# Altium PCB Pulser.PcbDoc
Units mm, origin at the board's own origin, x right, y up, seen from the top; angles counter-clockwise.
Board outline 46.4 x 20.7 mm, 4 copper layers (Top Layer, Int1 (GND), Int2 (PWR), Bottom Layer), stack 1.56 mm thick; 35 components, 29 nets, 127 pads, 60 vias.
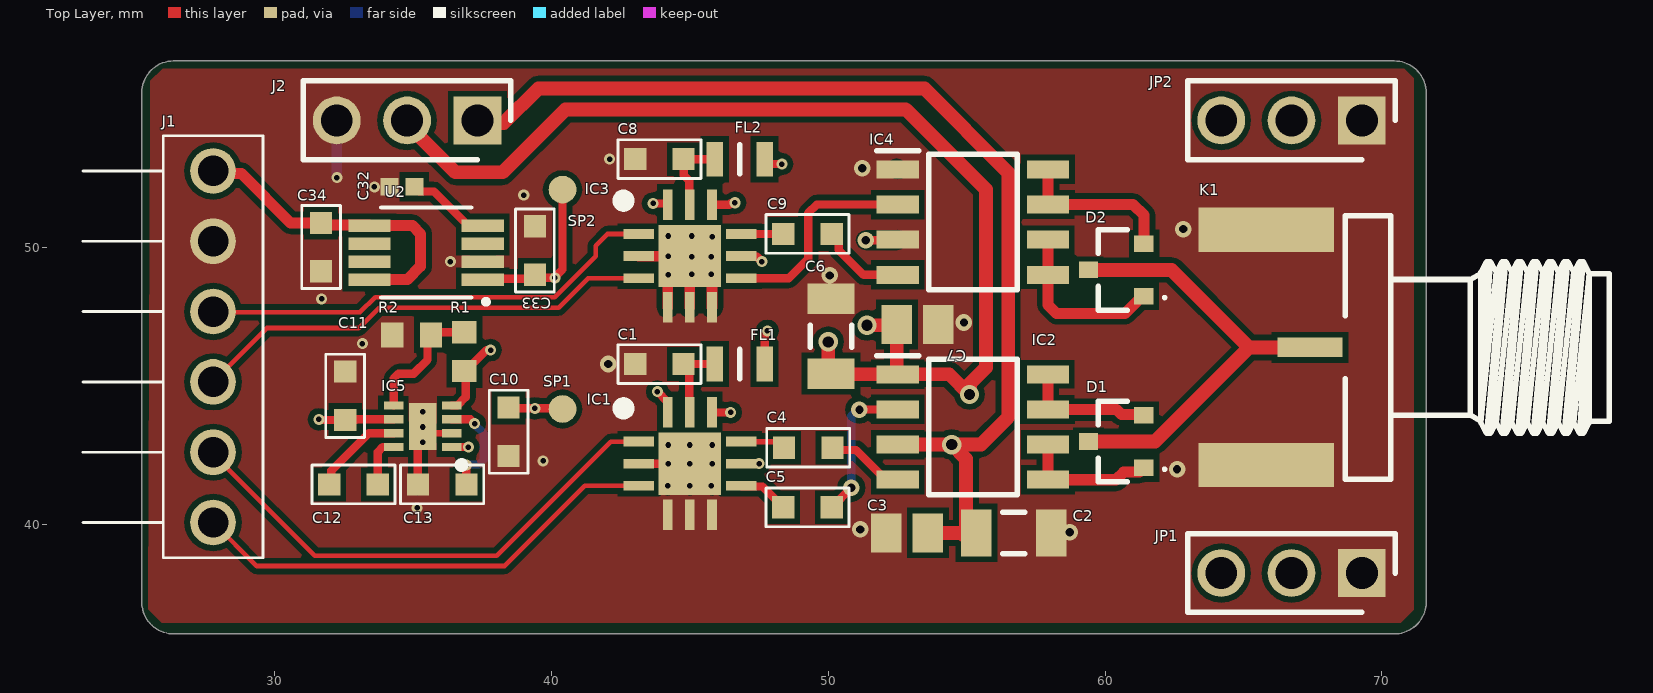
[diagram p0: Top Layer view]
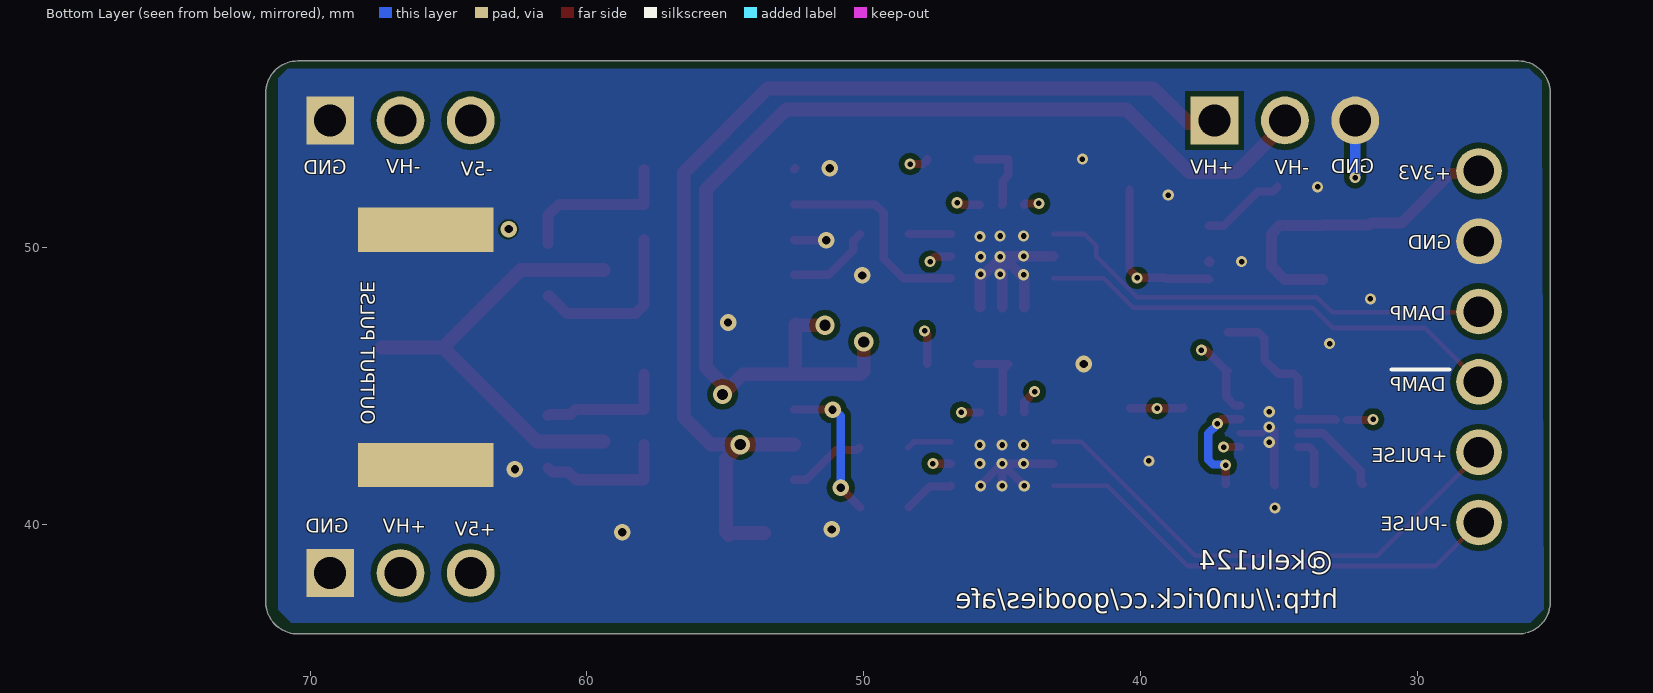
[diagram p1: Bottom Layer view, seen from below]
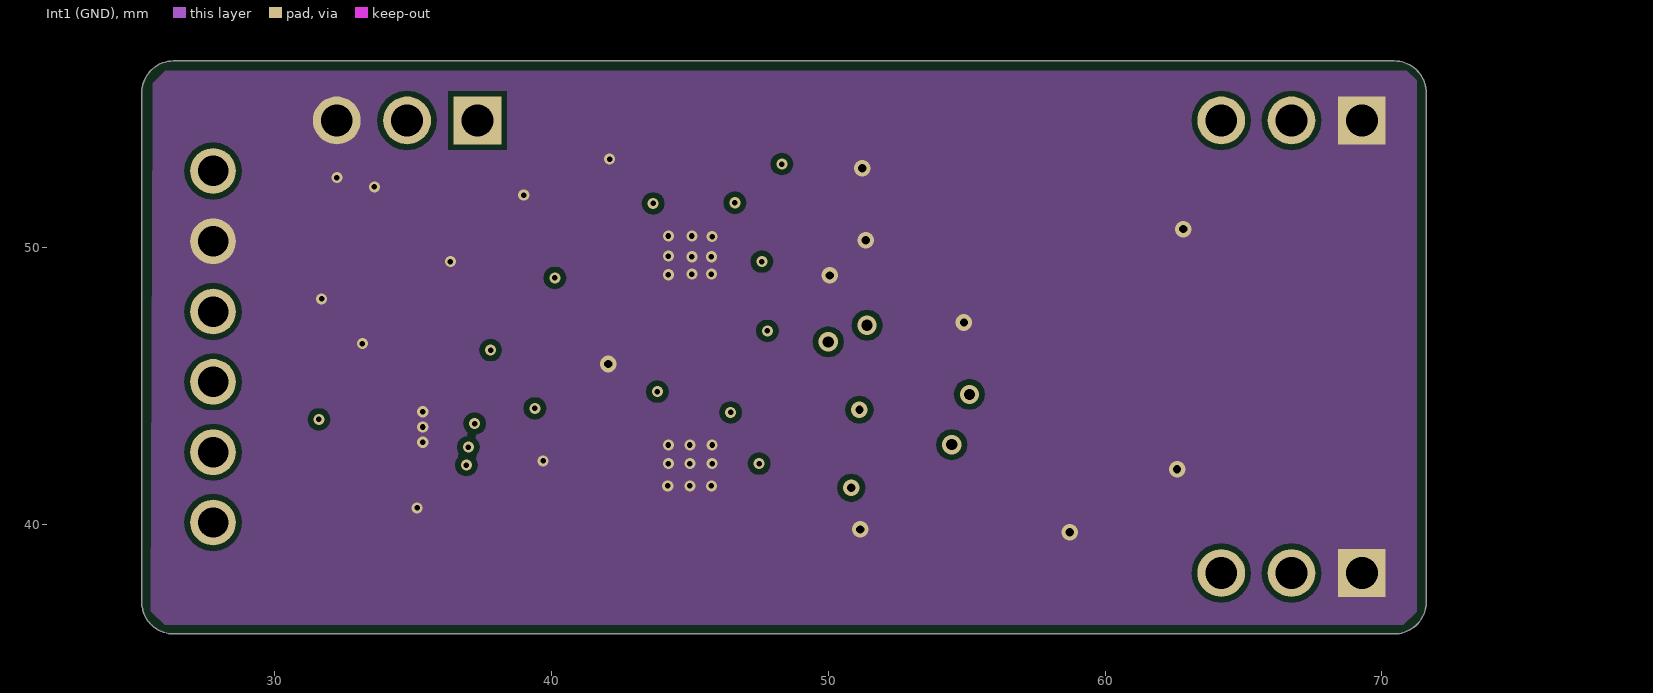
[diagram p2: Int1 (GND)]
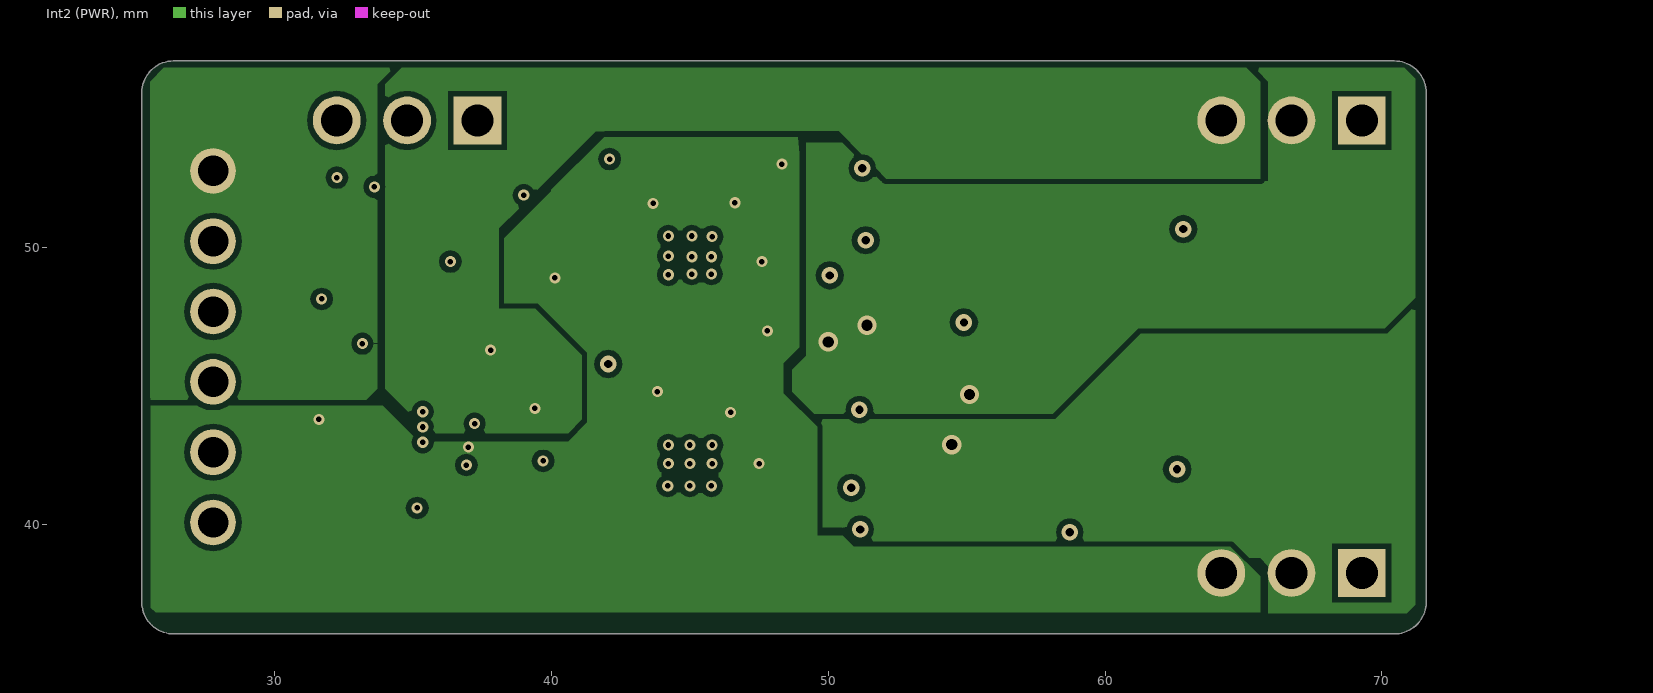
[diagram p3: Int2 (PWR)]
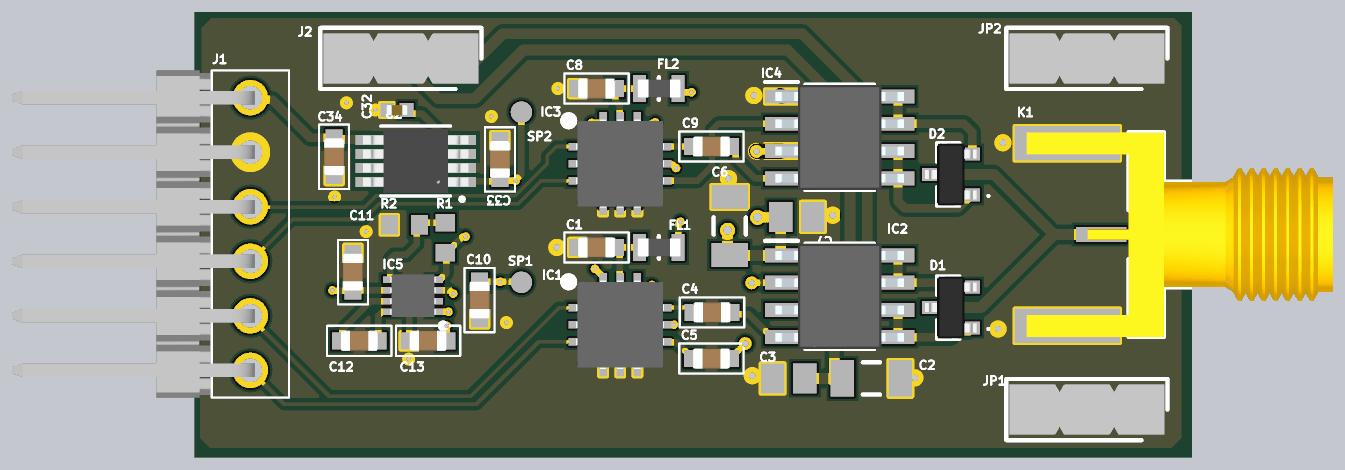
[diagram p4: 3D render of the assembled board from above, using the file's embedded part models]

## Layer stack, top to bottom
Top Solder: solder mask 0.0254, SM-001, Dk 4
Top Layer: signal copper 0.035
Dielectric 1: prepreg 0.11, PP-017, Dk 4.3
Int1 (GND): signal copper 0.035
Dielectric 3: core 1.2, Core-039, Dk 4.8
Int2 (PWR): signal copper 0.035
Dielectric 5: prepreg 0.11, PP-017, Dk 4.3
Bottom Layer: signal copper 0.035
Bottom Solder: solder mask 0.0254, SM-001, Dk 4

## Board outline
26.177,36.065 cw(c26.348,37.2) 25.212,37.03 cw(c25.4,37.1) 25.2,37.1 25.2,55.6 cw(c26.348,55.6) 26.347,56.748 cw(c26.348,56.548) 26.348,56.748 70.452,56.748 cw(c70.452,55.6) 71.6,55.6 71.6,37.1 cw(c71.4,37.1) 71.585,37.022 cw(c70.45,37.198) 70.614,36.061 cw(c70.552,36.252) 70.552,36.051 70.514,36.051 cw(c70.45,37.198) 70.45,36.05 cw(c70.45,36.25) 70.423,36.051 26.248,36.051 cw(c26.248,36.252)

## Design rules (kind name [scope] priority, off if disabled: settings)
Clearance [All] p1: gap=0.2 ignorepadtopadclearanceinfootprint=TRUE
ComponentClearance [All] p1: gap=0 collisioncheckmode=3 verticalgap=0 showdistances=FALSE
MinimumSolderMaskSliver [All] p1: minsoldermaskwidth=0
PolygonConnect [All] p1: connectstyle=Direct reliefconductorwidth=0.254 reliefentries=4 polygonreliefangle="90 Angle" airgapwidth=0.254
RoutingVias [All] p1: holewidth=0.2 width=0.4 viastyle="Through Hole" minholewidth=0.15 minwidth=0.3 maxholewidth=0.5 maxwidth=0.8
SilkToSilkClearance [All] p1: silktosilkclearance=0
SilkToSolderMaskClearance [IsPad] p1: minsilkscreentomaskgap=0 clearancetoexposedcopper=TRUE
SolderMaskExpansion [All] p1: expansion=0.102
UnRoutedNet [All] p1: checkbadconnections=TRUE
Width [All] p1: maxlimit=0.6 minlimit=0.15 preferedwidth=0.2
25 further rules are at their usual default settings.

## Components (designator, comment, footprint, x,y, rotation, side; value= is the part's Value field where it differs from the comment)
C1 "cap0603" "SM0603 _3D_cap" 43.9,45.8 r180 top value=100nF
C2 "cap0603" C1206 56.7,39.7 r0 top value="1uF 150V"
C3 "cap0603" C0805 52.85,39.7 r180 top value="100nF 150V"
C4 "cap0603" "SM0603 _3D_cap" 49.275,42.775 r0 top value=10nF
C5 "cap0603" "SM0603 _3D_cap" 49.25,40.625 r0 top value=10nF
C6 "cap0603" C1206 50.1,46.8 r90 top value="1uF 150V"
C7 "cap0603" C0805 53.225,47.225 r0 top value="100nF 150V"
C8 "cap0603" "SM0603 _3D_cap" 43.9,53.2 r180 top value=100nF
C9 "cap0603" "SM0603 _3D_cap" 49.25,50.5 r0 top value=10nF
C10 "cap0603" "SM0603 _3D_cap" 38.45,43.35 r270 top value="4.7u 16V"
C11 "cap0603" "SM0603 _3D_cap" 32.55,44.65 r90 top value="4.7u 16V"
C12 "cap0603" "SM0603 _3D_cap" 32.85,41.45 r180 top value=1u
C13 "cap0603" "SM0603 _3D_cap" 36.05,41.45 r180 top value="4.7u 16V"
C32 "cap0402" 0402_C 34.6,52.2 r0 top value=470p
C33 "cap0603" "SM0603 _3D_cap" 39.4,49.9 r90 top value=1u
C34 "cap0603" "SM0603 _3D_cap" 31.675,50.025 r270 top value="1u 16V"
D1 "BAV99" BAV99215 60.4,43 r90 top
D2 "BAV99" BAV99215 60.4,49.2 r90 top
FL1 "BLM21PG121SN1D" BLM21AG102BH1J 46.8,45.8 r0 top
FL2 "BLM21PG121SN1D" BLM21AG102BH1J 46.8,53.2 r0 top
IC1 "MD1213K6-G" QFN80P400X400X100-13N-D 45,42.2 r0 top
IC2 "TC6320TG-G" SOIC127P600X175-8N 55.225,43.525 r0 top
IC3 "MD1213K6-G" QFN80P400X400X100-13N-D 45,49.7 r0 top
IC4 "TC6320TG-G" SOIC127P600X175-8N 55.225,50.925 r0 top
IC5 "LM27761DSGR" SON50P200X200X80-9N 35.35,43.55 r180 top
J1 "90121-0766" 901210766 26.325,46.425 r90 top
J2 "5-146281-3" HDRV3W96P0X254_1X3_721X234X869P 37.325,54.6 r180 top
JP1 "5-146281-3" HDRV3W96P0X254_1X3_721X234X869P 69.275,38.25 r180 top
JP2 "5-146281-3" HDRV3W96P0X254_1X3_721X234X869P 69.275,54.6 r180 top
K1 "SMA_Edge" AMPHENOL_132357-11 67.4,46.4 r180 top
R1 "155K" 1608[0603] 36.85,46.25 r270 top value=1K
R2 "50K" 1608[0603] 34.95,46.85 r0 top value=1K
SP1 "SolderPad D1mm_round" "SolderPad_D1mm _round"#1 40.4,44.175 r90 top value="\"-5V\""
SP2 "SolderPad D1mm_round" "SolderPad_D1mm _round"#2 40.4,50.1 r90 top value="\"+5V\""
U2 "TC1107-5.0VUA" MSOP8_MC_MCH_ 35.475,49.825 r180 top

## Footprints (in the part's own frame and the unit in brackets; to place one, negate y for a bottom-side part, rotate by r counter-clockwise, add the part's x,y. Pads: shape width x height; smd on the part's side, far side on the other; paste and mask are expansions set on the pad)
0402_C [mm]
  rect 0.65x0.64 smd: 1(-0.45,0) 2(0.45,0)
  body extent -0.5,-0.25 0.5,0.25, height 0.56
1608[0603] [mm] "Chip Capacitor, Body 1.6x0.8mm, IPC High Density"
  rect 0.8x0.9 smd: 1(-0.7,0) 2(0.7,0)
  body extent -0.87,-0.48 0.87,0.48, height 1.3
901210766 [mm]
  round 1.65 hole 1.1: 1(-6.35,-1.45) 2(-3.81,-1.45) 3(-1.27,-1.45) 4(1.27,-1.45) 5(3.81,-1.45) 6(6.35,-1.45)
  silkscreen extent -7.62,-3.25 7.62,3.25, body extent -7.62,-1.66 7.62,9.66, height 3.42
AMPHENOL_132357-11 [mm]
  rect 2.35x0.7 smd: 1(0,0)
  rect 4.9x1.6 smd: 2(1.575,4.25) 2(1.575,-4.25)
  rect 4.9x1.6 smd far side: 2(1.575,4.25) 2(1.575,-4.25)
  silkscreen extent -10.81,-4.76 -1.28,4.76, body extent -10.8,-4.76 3.48,4.76, height 4.08
BAV99215 [mm]
  rect 0.6x0.7 smd: 1(-0.95,-1) 2(0.95,-1) 3(0,1)
  silkscreen extent -1.45,-1.8 1.45,0.65, body extent -1.45,-1.2 1.45,1.2, height 0.95
BLM21AG102BH1J [mm]
  rect 0.6x1.25 smd: 1(-0.9,0) 2(0.9,0)
  silkscreen extent 0,-0.53 0,0.53, body extent -0.98,-0.43 1.02,0.43, height 0.63
C0805 [mm] "Chip Capacitor, Body 2.0x1.3mm, IPC High Density"
  rect 1.1x1.4 smd: 1(-0.75,0) 2(0.75,0)
  body extent -1.1,-0.72 1.1,0.72, height 1.4
C1206 [mm] "Chip Capacitor, Body 3.2x1.6mm, IPC High Density"
  rect 1.1x1.7 smd: 1(-1.35,0) 2(1.35,0)
  silkscreen extent -0.4,-0.75 0.4,0.75, body extent -1.7,-0.9 1.7,0.9, height 1.3
HDRV3W96P0X254_1X3_721X234X869P [mm]
  rect 1.725x1.725 hole 1.15: 1(0,0)
  round 1.725 hole 1.15: 2(2.54,0) 3(5.08,0)
  silkscreen extent -1.21,-1.43 6.29,1.43, body extent -1.07,-1.17 6.15,1.17, height 8.12
MSOP8_MC_MCH_ [mil]
  rect 60x18 smd paste+0 mask+0: 1(-80.5,38.39) 2(-80.5,12.8) 3(-80.5,-12.8) 4(-80.5,-38.39) 5(80.5,-38.39) 6(80.5,-12.8) 7(80.5,12.8) 8(80.5,38.39)
  silkscreen extent -87,-64 64,72, body extent -96,-59 96,59, height 43
QFN80P400X400X100-13N-D [mm]
  rect 1.1x0.35 smd: 1(-1.85,0.8) 2(-1.85,0) 3(-1.85,-0.8) 7(1.85,-0.8) 8(1.85,0) 9(1.85,0.8)
  rect 0.35x1.1 smd: 4(-0.8,-1.85) 5(0,-1.85) 6(0.8,-1.85) 10(0.8,1.85) 11(0,1.85) 12(-0.8,1.85)
  rect 2.25x2.25 smd: 13(0,0)
  silkscreen extent -2.6,1.8 -2.2,2.2, body extent -2.05,-2.05 2.05,2.05, height 1
"SM0603 _3D_cap" [mm]
  rect 0.8x0.8 smd: 1(-0.875,0) 2(0.875,0)
  silkscreen extent -1.5,-0.7 1.5,0.7, body extent -0.87,-0.47 0.88,0.48, height 0.87
SOIC127P600X175-8N [mm]
  rect 1.525x0.65 smd: 1(-2.712,1.905) 2(-2.712,0.635) 3(-2.712,-0.635) 4(-2.712,-1.905) 5(2.712,-1.905) 6(2.712,-0.635) 7(2.712,0.635) 8(2.712,1.905)
  silkscreen extent -3.47,-2.45 1.6,2.58, body extent -3,-2.45 3,2.45, height 1.75
"SolderPad_D1mm _round"#1 [mm]
  round 1 smd: 1(0,0)
"SolderPad_D1mm _round"#2 [mm]
  round 1 smd: 1(2,0)
SON50P200X200X80-9N [mm]
  rect 0.7x0.3 smd: 1(-1.05,0.75) 2(-1.05,0.25) 3(-1.05,-0.25) 4(-1.05,-0.75) 5(1.05,-0.75) 6(1.05,-0.25) 7(1.05,0.25) 8(1.05,0.75)
  rect 1x1.7 smd: 9(0,0)
  silkscreen extent -1.53,1.28 -1.28,1.52, body extent -1.05,-1 1.05,1, height 0.8

## Part data
C1 C2 C3 C4 C5 C6 C7 C8 C9 C10 C11 C12 C13 C33 C34: "Capacitor  0603 inch", LatestRevisionDate=17-Jul-2002, LatestRevisionNote="Re-released for DXP Platform.", PackageDescription="Radial Cap, Thru-Hole; 2 Leads; 0.3 in Pin Spacing", PackageReference=RAD-0.3, Published=8-Jun-2000, Publisher="Altium Limited"
C32: library part cap0603, "Capacitor  0402 inch", LatestRevisionDate=17-Jul-2002, LatestRevisionNote="Re-released for DXP Platform.", PackageDescription="Radial Cap, Thru-Hole; 2 Leads; 0.3 in Pin Spacing", PackageReference=RAD-0.3, Published=8-Jun-2000, Publisher="Altium Limited"
D1 D2: library part BAV99,215, "Diode", Manufacturer_Name=Nexperia, Mouser Part Number=771-BAV99-T/R, Arrow Part Number=BAV99,215, Arrow Price/Stock=https://www.arrow.com/en/products/bav99215/nexperia?region=nac, Datasheet Link=https://assets.nexperia.com/documents/data-sheet/BAV99_SER.pdf, Height=1.1mm, Manufacturer_Part_Number=BAV99,215, Mouser Price/Stock=https://www.mouser.co.uk/ProductDetail/Nexperia/BAV99215?qs=me8TqzrmIYWbN0bCKV3n5w%3D%3D
FL1 FL2: "Filter", Manufacturer_Name="Murata Electronics", Mouser Part Number=81-BLM21PG121SN1D, Arrow Part Number=BLM21PG121SN1D, Arrow Price/Stock=https://www.arrow.com/en/products/blm21pg121sn1d/murata-manufacturing?region=nac, Datasheet Link=https://www.murata.com/en-us/products/productdetail?partno=BLM21PG121SN1%23, Height=1.05mm, Manufacturer_Part_Number=BLM21PG121SN1D, Mouser Price/Stock=https://www.mouser.co.uk/ProductDetail/Murata-Electronics/BLM21PG121SN1D?qs=MY6wChARw2zaR3kESBLGTQ%3D%3D
IC1 IC3: "Integrated Circuit", Manufacturer_Name=Microchip, Mouser Part Number=689-MD1213K6-G, Arrow Part Number=MD1213K6-G, Arrow Price/Stock=https://www.arrow.com/en/products/md1213k6-g/microchip-technology, Datasheet Link=http://www.microchip.com/mymicrochip/filehandler.aspx?ddocname=en570148, Height=1mm, Manufacturer_Part_Number=MD1213K6-G, Mouser Price/Stock=https://www.mouser.co.uk/ProductDetail/Microchip-Technology/MD1213K6-G?qs=yzbL9BrvDmMQeiy2ctoE9A%3D%3D
IC2 IC4: "Integrated Circuit", Manufacturer_Name=Microchip, Mouser Part Number=689-TC6320TG-G, Arrow Part Number=TC6320TG-G, Arrow Price/Stock=https://www.arrow.com/en/products/tc6320tg-g/microchip-technology?region=nac, Datasheet Link=https://ww1.microchip.com/downloads/en/DeviceDoc/20005697A.pdf, Height=1.75mm, Manufacturer_Part_Number=TC6320TG-G, Mouser Price/Stock=https://www.mouser.co.uk/ProductDetail/Microchip-Technology/TC6320TG-G?qs=%252BgoAgGjL%252Bh4K5qliaxT5nQ%3D%3D
IC5: "Integrated Circuit", Manufacturer_Name="Texas Instruments", Mouser Part Number=595-LM27761DSGR, Arrow Part Number=LM27761DSGR, Arrow Price/Stock=https://www.arrow.com/en/products/lm27761dsgr/texas-instruments?region=nac, Datasheet Link=http://www.ti.com/lit/gpn/lm27761, Height=0.8mm, Manufacturer_Part_Number=LM27761DSGR, Mouser Price/Stock=https://www.mouser.co.uk/ProductDetail/Texas-Instruments/LM27761DSGR?qs=jK8VN%252BJp1h5rfPCO21nS4g%3D%3D
J1: "Connector", Manufacturer_Name=Molex, Mouser Part Number=538-90121-0766, Datasheet Link=http://www.molex.com/webdocs/datasheets/pdf/en-us/0901210766_PCB_HEADERS.pdf, Height=4mm, Manufacturer_Part_Number=90121-0766, Mouser Price/Stock=https://www.mouser.co.uk/ProductDetail/Molex/90121-0766?qs=PvP5v7EimslgD6hQyHQ2Ag%3D%3D
J2 JP1 JP2: "Connector", Manufacturer_Name="TE Connectivity", Mouser Part Number=571-5-146281-3, Arrow Part Number=5-146281-3, Arrow Price/Stock=https://www.arrow.com/en/products/5-146281-3/te-connectivity, Datasheet Link=http://www.te.com/commerce/DocumentDelivery/DDEController?Action=showdoc&DocId=Customer+Drawing%7F146281%7FG2%7Fpdf%7FEnglish%7FENG_CD_146281_G2.pdf%7F5-146281-3, Height=8.69mm, Manufacturer_Part_Number=5-146281-3, Mouser Price/Stock=https://www.mouser.co.uk/ProductDetail/TE-Connectivity/5-146281-3?qs=bwpFY26eRVc0RlLXOkMSNw%3D%3D
R1 R2: library part Res1, "Resistor", LatestRevisionDate=17-Jul-2002, LatestRevisionNote="Re-released for DXP Platform.", PackageDescription="Axial Device, Thru-Hole; 2 Leads; 0.3 in Pin Spacing", PackageReference=AXIAL-0.3, Published=8-Jun-2000, Publisher="Altium Limited"
SP1 SP2: "for finger touch"
U2: "No Description Available", Mfr_Name=Microchip, Copyright="Copyright (C) 2022 Ultra Librarian. All rights reserved.", Manufacturer_Part_Number=TC1107-5.0VUA, RefDes=RefDes, Type=DEV

## Via types
v1: diameter 0.4, hole 0.2, Top Layer to Bottom Layer, 45 vias
v2: diameter 0.6, hole 0.3, Top Layer to Bottom Layer, 11 vias
v3: diameter 0.7, hole 0.4, Top Layer to Bottom Layer, 4 vias

## Nets (pads, with @x,y where several pads share a name; then routed paths per layer and width w, separated by ;. In a path a pad name is that pad's centre, name@x,y a point inside that pad or via, vN(x,y) a via of type N, cw(c..) or ccw(c..) an arc to the next point about the centre after c; other vN are vias at no path point)
+3V3: C34.1 J1.6 U2.5 U2.8 | length 11.7
  Top Layer w0.4: J1.6 27.875,52.675 28.8,52.675 30.575,50.9 C34.1 31.746,50.829 33.402,50.829 U2.5 34.975,50.8 35.275,50.5 35.275,49.333 34.792,48.85 U2.8
+5V: C11.1 C33.1 FL1.2 FL2.2 IC1.8 IC1.10 IC1.12 IC3.8 IC3.10 IC3.12 IC5.1 IC5.6 JP1.3 SP2.1 U2.1 | length 15.3
  Top Layer w0.3: v1(31.6,43.8) 31.625,43.775 C11.1 ; C11.1@32.95,43.775 32.975,43.8 IC5.6 ; IC5.1 v1(37,42.8) ; U2.1 37.545,48.875 39.075,48.875 39.113,48.912 v1(40.125,48.912) 40.125,48.94 40.4,49.215 SP2.1 ; v1(43.675,51.6) 44.175,51.6 44.2,51.575 IC3.12 ; v1(43.825,44.8) 44.2,44.425 IC1.12 ; IC1.10 v1(46.475,44.05) ; IC3.10 46.425,51.55 46.481,51.606 46.606,51.606 v1(46.625,51.625) ; IC1.8 v1(47.5,42.2) ; IC3.8 46.875,49.675 47.425,49.675 v1(47.6,49.5) ; FL1.2 47.7,46.875 47.8,46.975 v1(47.8,47) ; FL2.2 47.7,53.175 47.85,53.025 v1(48.325,53.025)
+HV: C2.1 C3.1 IC2.3 J2.1 JP1.2 | length 39.1
  Top Layer w0.5: J2.1 37.425,54.5 38.275,54.5 39.525,55.75 53.475,55.75 56.5,52.725 56.5,43.875 55.515,42.89 v3(54.46,42.89) ; IC2.3 v3(54.46,42.89) ; C3.1 54.8,39.7 54.875,39.625 54.975,39.725 54.975,42.375 v3(54.46,42.89)
+PULSE: IC1.1 J1.2 | length 18.7
  Top Layer w0.17: J1.2 27.775,42.543 31.448,38.87 38.027,38.87 42.15,42.993 43.143,42.993 IC1.1
-5V: C10.1 IC5.4 JP2.3 R1.2 SP1.1 | length 4.8
  Top Layer w0.3: IC5.4 36.6,44.3 36.9,44.6 36.9,45.5 R1.2 36.9,45.55 37.65,46.3 v1(37.8,46.3) ; C10.1 38.475,44.2 v1(39.4,44.2) SP1.1@40.375,44.2
-HV: C6.1 C7.1 IC2.1 J2.2 JP2.2 | length 40.8
  Top Layer w0.5: J2.2@34.785,54.475 36.535,52.725 38.225,52.725 40.5,55 52.8,55 55.7,52.1 55.7,45.675 55.125,45.1 55.125,44.725 v3(55.1,44.7) 54.37,45.43 IC2.1 ; v3(50,46.6) 50,45.55 C6.1 50.12,45.43 IC2.1 ; v3(51.4,47.2) 52.45,47.2 C7.1 52.475,45.468 IC2.1
-PULSE: IC1.3 J1.1 | length 17.2
  Top Layer w0.17: J1.1 29.35,38.5 38.3,38.5 41.2,41.4 IC1.3
D\A\M\P\: IC3.3 J1.3 | length 16.9
  Top Layer w0.17: J1.3 29.72,47.1 33.039,47.1 33.774,47.835 40.257,47.835 41.322,48.9 IC3.3
DAMP: IC3.1 J1.4 | length 16.8
  Top Layer w0.17: J1.4 27.805,47.665 33.081,47.665 33.631,48.215 40.113,48.215 41.6,49.702 41.6,50.073 42.027,50.5 IC3.1
GND: C1.2 C2.2 C3.2 C6.2 C7.2 C8.2 C10.2 C11.2 C13.2 C32.1 C33.2 C34.2 IC1.2 IC1.4 IC1.5 IC1.6 IC1.13 IC3.2 IC3.4 IC3.5 IC3.6 IC3.13 IC4.1 IC4.3 IC5.2 IC5.9 J1.5 J2.3 JP1.1 JP2.1 K1.2 R2.1 U2.2 | length 19.5
  Top Layer w0.25: IC5.9@35.362,43.538 35.6,43.3 IC5.2
  Top Layer w0.3: C13.2@35.15,41.425 C13.2 35.175,43.375 IC5.9 ; IC1.2 v1(44.225,42.2) v1(45,42.2) ; v1(44.2,41.4) v1(45,42.2) ; v1(45,41.4) v1(45,42.2) ; IC1.13@45.8,41.4 v1(45,42.2) ; v2(51.35,50.275) 52.498,50.275 IC4.3 ; IC4.1@52.468,52.875 IC4.1
  Top Layer w0.381: IC3.2 v1(44.225,49.7) IC3.13 ; IC3.4 44.2,48.9 IC3.13 ; IC3.5 IC3.13 ; IC3.6 45.8,48.9 IC3.13
  Bottom Layer w0.3: v2(62.825,50.675) v2@62.85,50.65
  Bottom Layer w0.381: J2.3@32.245,54.475 32.245,52.54 v1(32.25,52.535)
  other v1: 35.15,40.6 45.775,41.4 45.8,42.2 39.7,42.3 44.225,42.875 45,42.875 45.8,42.875 35.35,42.975 35.35,43.525 35.35,44.075 33.168,46.538 31.7,48.15 44.225,49.025 45.075,49.05 45.775,49.05 36.35,49.5 45.075,49.675 45.775,49.675 45.8,50.4 44.225,50.425 45.075,50.425 39,51.9 33.6,52.2 42.1,53.2
  other v2: 58.725,39.725 51.15,39.825 62.6,42 42.05,45.8 54.9,47.3 50.05,49 51.225,52.875
NetC1_1: C1.1 FL1.1 IC1.11 | length 3
  Top Layer w0.3: IC1.11 44.975,44.075 44.975,45.6 C1.1 FL1.1
NetC4_1: C4.1 IC1.9 | length 1.6
  Top Layer w0.2: IC1.9 48.175,43 C4.1
NetC4_2: C4.2 IC2.4 | length 2.8
  Top Layer w0.3: C4.2 50.23,42.695 51,42.695 52.075,41.62 IC2.4
NetC5_1: C5.1 IC1.7 | length 1.8
  Top Layer w0.3: IC1.7 46.875,41.375 47.625,41.375 C5.1
NetC5_2: C5.2 IC2.2 | length 5.4
  Top Layer w0.3: C5.2 v2(50.825,41.325) ; v2(51.125,44.15) 51.135,44.16 IC2.2
  Bottom Layer w0.3: v2(50.825,41.325) 50.825,43.925 51.05,44.15 v2(51.125,44.15)
NetC8_1: C8.1 FL2.1 IC3.11 | length 2.9
  Top Layer w0.3: IC3.11 44.975,51.575 44.975,52.425 44.775,52.625 C8.1 FL2.1
NetC9_1: C9.1 IC3.9 | length 1.5
  Top Layer w0.3: IC3.9 C9.1
NetC9_2: C9.2 IC4.4 | length 3.2
  Top Layer w0.3: C9.2 50.375,50.25 50.375,49.925 51.28,49.02 IC4.4
NetC12_1: C12.1 IC5.8 | length 1.8
  Top Layer w0.3: C12.1 33.725,42.624 33.901,42.8 IC5.8
NetC12_2: C12.2 IC5.7 | length 3.3
  Top Layer w0.3: C12.2 32.05,41.525 32.05,41.95 33.4,43.3 IC5.7
NetC13_1: C13.1 IC5.3 | length 3.8
  Top Layer w0.3: IC5.3 37.075,43.8 v1(37.225,43.65) ; C13.1 v1(36.925,42.15)
  Bottom Layer w0.3: v1(36.925,42.15) 36.944,42.169 37.379,42.169 37.555,42.345 37.555,43.293 37.225,43.623 v1(37.225,43.65) v1@37.252,43.65
NetC32_2: C32.2 U2.4 | length 3.1
  Top Layer w0.3: C32.2 35.22,52.03 35.756,52.03 36.986,50.8 U2.4 U2.4@37.532,50.788
NetD1_1: D1.1 IC2.5 IC2.6 | length 4.9
  Top Layer w0.4: IC2.6 IC2.5 60.395,41.62 60.675,41.9 61.25,41.9 D1.1
NetD1_2: D1.2 IC2.7 IC2.8 | length 4.8
  Top Layer w0.4: IC2.8 IC2.7 60.415,44.16 60.6,43.975 61.375,43.975 D1.2
NetD1_3: D1.3 D2.3 K1.1 | length 16.4
  Top Layer w0.5: D1.3 61.8,43 65.2,46.4 ; D2.3 62.4,49.2 65.2,46.4 ; K1.1 65.2,46.4
NetD2_1: D2.1 IC4.5 IC4.6 | length 6.2
  Top Layer w0.4: IC4.6 IC4.5 57.937,47.938 58.25,47.625 60.725,47.625 61.35,48.25 D2.1
NetD2_2: D2.2 IC4.7 IC4.8 | length 5.9
  Top Layer w0.4: IC4.8 IC4.7 61.015,51.56 61.4,51.175 D2.2
NetIC3_7: IC3.7 IC4.2 | length 7.7
  Top Layer w0.3: IC3.7 48.575,48.9 49.275,49.6 49.275,51.25 49.585,51.56 IC4.2
NetIC5_5: IC5.5 R1.1 R2.2 | length 4.7
  Top Layer w0.3: IC5.5 34.3,45.274 34.476,45.45 35.025,45.45 35.525,45.95 35.525,46.725 R2.2 35.75,46.95 R1.1
pads on no net: U2.3 U2.6 U2.7

## Polygon pours and split planes (outlines as drawn)
+3V3 on Int2 (PWR) "Int2 (PWR)-+3V3" (solid, pour order 10): 34.3,56.5 33.7,55.9 33.7,44.9 33.3,44.5 25.5,44.5 25.5,56 26,56.5
-5V on Int2 (PWR) "Int2 (PWR)--5V" (solid, pour order 8): 65.1,56.5 65.6,56 65.6,52.5 52.1,52.5 50.4,54.2 41.6,54.2 38.1,50.7 38.1,47.8 39.5,47.8 41.1,46.2 41.1,43.8 40.6,43.3 35.6,43.3 34,44.9 34,55.9 34.6,56.5
+5V on Int2 (PWR) "Int2 (PWR)-+5V" (solid, pour order 6): 40,52.048 38.3,50.348 38.3,48 39.5,48 41.3,46.2 41.3,43.7 40.6,43 35.2,43 33.9,44.3 25.525,44.3 25.525,37.257 25.525,37 25.7,36.825 65.6,36.825 65.6,38.125 64.525,39.2 50.925,39.2 50.525,39.6 49.6,39.6 49.6,43.525 48.375,44.75 48.375,45.825 48.95,46.4 48.95,53.4 48.9,54 41.9,54 40,52.1
-HV on Int2 (PWR) "Int2 (PWR)--HV" (solid, pour order 12): 49.2,53.8 49.2,46.1 48.7,45.6 48.7,44.8 49.5,44 58.1,44 61.2,47.1 70.1,47.1 71.2,48.2 71.2,56.1 70.8,56.5 65.5,56.5 65.5,56.4 65.9,56 65.9,52.4 51.9,52.4 50.5,53.8
+HV on Int2 (PWR) "Int2 (PWR)-+HV" (solid, pour order 14): 49.7,43.8 49.7,39.9 50.5,39.9 51.6,38.8 65.6,38.8 65.9,38.5 65.9,36.8 70.9,36.8 71.2,37.1 71.2,47.9 70.2,46.9 61.3,46.9 58.2,43.8
GND on Top Layer "GND_L01_P002" (solid, pour order 2): 25.5,55.15 25.5,56.025 25.95,56.475 70.8,56.475 71.15,56.125 71.15,36.925 70.675,36.45 25.925,36.45 25.425,36.95 25.425,36.925
GND on Bottom Layer "GND_L04_P004" (solid, pour order 4): 25.5,55.15 25.5,56.025 25.95,56.475 70.8,56.475 71.15,56.125 71.15,36.925 70.675,36.45 25.925,36.45 25.425,36.95 25.425,36.925
GND on Int1 (GND) "GND_L02_P000" (solid, pour order 0): 25.6,55.075 25.6,55.95 26.05,56.4 70.9,56.4 71.25,56.05 71.25,36.85 70.775,36.375 26.025,36.375 25.525,36.875 25.525,36.85

## Silkscreen, mask and mechanical layers (free items; w line width, h text height)
Bottom Overlay:
  lines w0.15: 28.85,45.6 30.925,45.6
  text "GND" at 31.55,52.7 h0.5
  text "-HV" at 66,52.7 h0.5
  text "+HV" at 36.625,52.675 h0.5
  text "-HV" at 33.9,52.65 h0.5
  text "GND" at 68.675,52.65 h0.5
  text "-5V" at 63.4,52.6 h0.5
  text "+3V3" at 28.775,52.45 h0.5
  text "GND" at 28.775,49.95 h0.5
  text "DAMP" at 28.975,47.375 h0.5
  text "DAMP" at 28.975,44.825 h0.5
  text "OUTPUT PULSE" at 68.175,43.6 h0.5 r90
  text "+PULSE" at 28.9,42.25 h0.5
  text "-PULSE" at 28.9,39.775 h0.5
  text "+HV" at 65.8,39.7 h0.5
  text "GND" at 68.6,39.7 h0.5
  text "+5V" at 63.3,39.6 h0.5
  text "@kelu124" at 33.05,38.375 h0.7
  text "http://un0rick.cc/goodies/afe" at 32.85,36.975 h0.7
Mechanical 5:
  lines w0.4: 25.4,37.1 25.4,55.6 cw(c26.348,55.6) 26.348,56.548 70.452,56.548 cw(c70.452,55.6) 71.4,55.6 71.4,37.1 ; 25.4,37.2 ccw(c26.348,37.2) 26.348,36.252 ; 26.248,36.252 70.552,36.252 ; 70.45,36.25 ccw(c70.45,37.198) 71.398,37.198